# EAGLE board windidr (EAGLE 9.6.2)
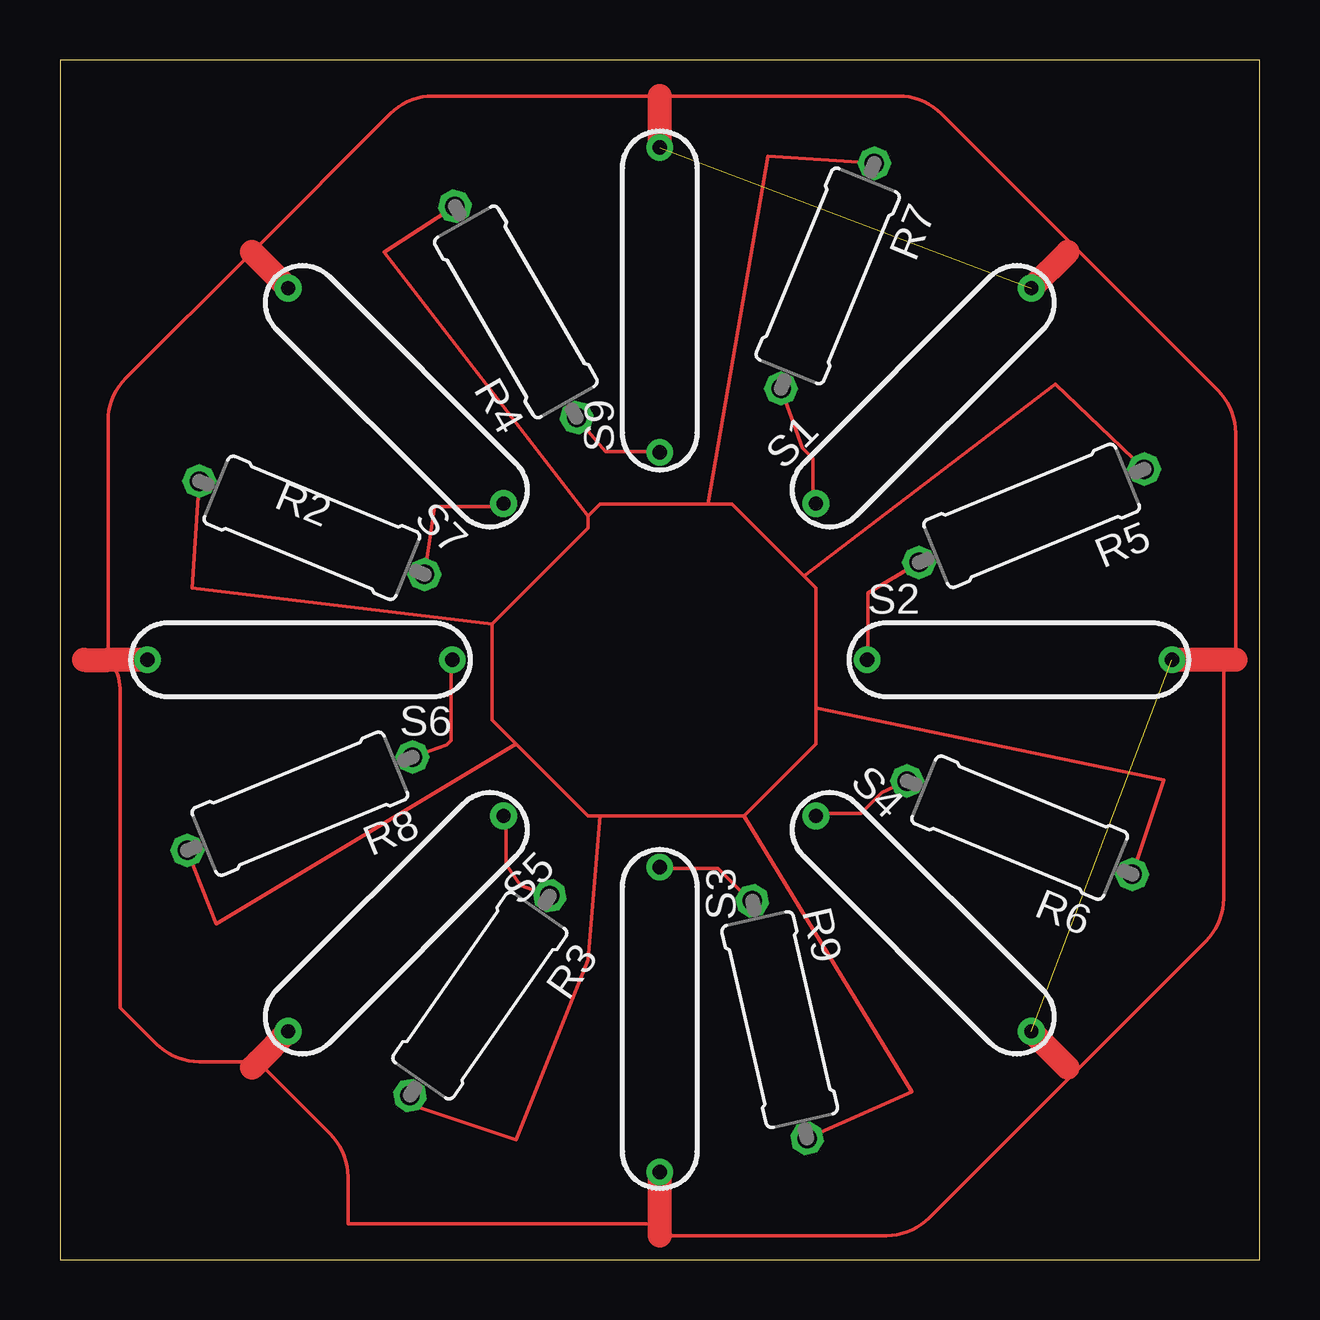
[diagram p0: board, top side]

Size 50 x 50 mm. Coordinates in mm from the lower left corner, seen from the top.
Outline: 0,0 50,0 50,50 0,50 0,0
Copper layers (1*16): Top 0.035mm / dielectric 1.5mm / Bottom 0.035mm
Design rules "default": minimum track width 6mil, minimum drill 0.35mm, track to track 6mil, track to pad 6mil, pad to pad 6mil, via to via 6mil, smd to smd 6mil, copper to edge 40mil, drill to drill 6mil, minimum pad ring 10mil, minimum via ring 8mil, stop-mask expansion 4mil, vias tented up to drill 0mil, thermal gap 10mil

## Footprints (pad centres in the part's own frame; a part is rotated, then mirrored left to right if it is on the bottom)
0309/10 = drill 0.813 octagon: 1 -5.08,0; 2 5.08,0
MK6-5 = drill 0.6 pad 1.016: 1 -6.35,0; 2 6.35,0

## Placement (x,y rotation side)
R2  [0309/10]  10.5,30.5 337.5 top
R3  [0309/10]  17.5,11 235 top
R4  [0309/10]  19,39.5 120 top
R5  [0309/10]  40.5,31 202.5 top
R6  [0309/10]  40,18 157.5 top
R7  [0309/10]  32,41 247.5 top
R8  [0309/10]  10,19 202.5 top
R9  [0309/10]  30,10 283 top
S1  REED-SWITCH-MK6-5-B  [MK6-5]  36,36 45 top
S2  REED-SWITCH-MK6-5-B  [MK6-5]  40,25 0 top
S3  REED-SWITCH-MK6-5-B  [MK6-5]  25,10 270 top
S4  REED-SWITCH-MK6-5-B  [MK6-5]  36,14 315 top
S5  REED-SWITCH-MK6-5-B  [MK6-5]  14,14 225 top
S6  REED-SWITCH-MK6-5-B  [MK6-5]  10,25 180 top
S7  REED-SWITCH-MK6-5-B  [MK6-5]  14,36 135 top
S9  REED-SWITCH-MK6-5-B  [MK6-5]  25,40 90 top

## Library data of the parts
R2-R9 = rcl; SPICEPREFIX: R
S1-S7 S9 = switch-reed; MF: MEDER; MPN: MK6-5-B; OC_FARNELL: 1079479

## Nets
N$2: R4.1 S9.1
N$3: R6.2 S4.1
N$4: R3.1 S5.1
N$5: R2.2 S7.1
N$6: R5.2 S2.1
N$7: R7.2 S1.1
N$8: R8.1 S6.1
N$9: R4.2
N$10: R9.1 S3.1
N$11: R6.1
N$12: R2.1
N$13: R8.2
N$14: R9.2
N$15: R5.1
N$16: R7.1
OUT: S1.2 S2.2 S3.2 S4.2 S5.2 S6.2 S7.2 S9.2

## Tracks (layer width: path | path; a pad name or v marks a point on that pad's centre or on a via)
N$1
  Top 0.152: 14.5,6.5 19,5 22,12.5 22.5,18.5
N$2
  Top 0.152: S9.1 24.99,33.68 22.73,33.68 R4.1
N$3
  Top 0.152: S4.1 31.55,18.59 33.38,18.59 34.25,19.47 R6.2
N$4
  Top 0.152: S5.1 18.59,18.44 18.59,16.46 19.2,15.6 R3.1
N$5
  Top 0.152: S7.1 18.44,31.39 15.61,31.39 R2.2
N$6
  Top 0.152: S2.1 33.68,25.15 33.68,27.79 R5.2
N$7
  Top 0.152: S1.1 31.39,31.55 31.39,33.38 30.96,33.81 R7.2
N$8
  Top 0.152: S6.1 16.31,24.99 16.31,21.64 16.12,21.46 R8.1
N$9
  Top 0.152: R4.2 13.5,42 22,31
N$10
  Top 0.152: S3.1 25.15,16.31 27.43,16.31 28.76,14.98 R9.1
N$11
  Top 0.152: R6.1 46,20 31.5,23
N$12
  Top 0.152: R2.1 5.5,28 18,26.5 | 18,26.5 22,30.5 22,31 22.5,31.5 28,31.5 31.5,28 31.5,21.5 28.5,18.5 22,18.5 18,22.5 18,26.5
N$13
  Top 0.152: R8.2 6.5,14 19,21.5
N$14
  Top 0.152: R9.2 35.5,7 28.5,18.5
N$15
  Top 0.152: R5.1 41.49,36.49 31,28.5
N$16
  Top 0.152: R7.1 29.5,46 27,31.5
OUT  (2 unrouted)
  Top 0.152: 49,25 49,34.45 arc45 48.26,36.24 36.74,47.76 arc45 34.95,48.5 25,48.5 15.55,48.5 arc45 13.76,47.76 8,42 2.74,36.74 arc45 2,34.95 2,25 arc-45 2.5,23.79 2.5,10.5 4.01,8.99 arc45 5.8,8.25 8.25,8.25 11.26,5.24 arc-45 12,3.45 12,1.5 24.29,1.5 arc-45 25.5,1 | 48.5,25 48.5,15.05 arc-45 47.76,13.26 36.24,1.74 arc-45 34.45,1 25.5,1 | 25.5,1 25,1
  Top 1: S6.2 2,25 1,25 | S5.2 8.25,8.25 8,8 | 25,1 S3.2 | S4.2 42,8 | 49,25 48.5,25 S2.2 | S1.2 42,42 | S9.2 25,48.5 | S7.2 8,42